# EAGLE board DaviShematic (EAGLE 9.6.2)
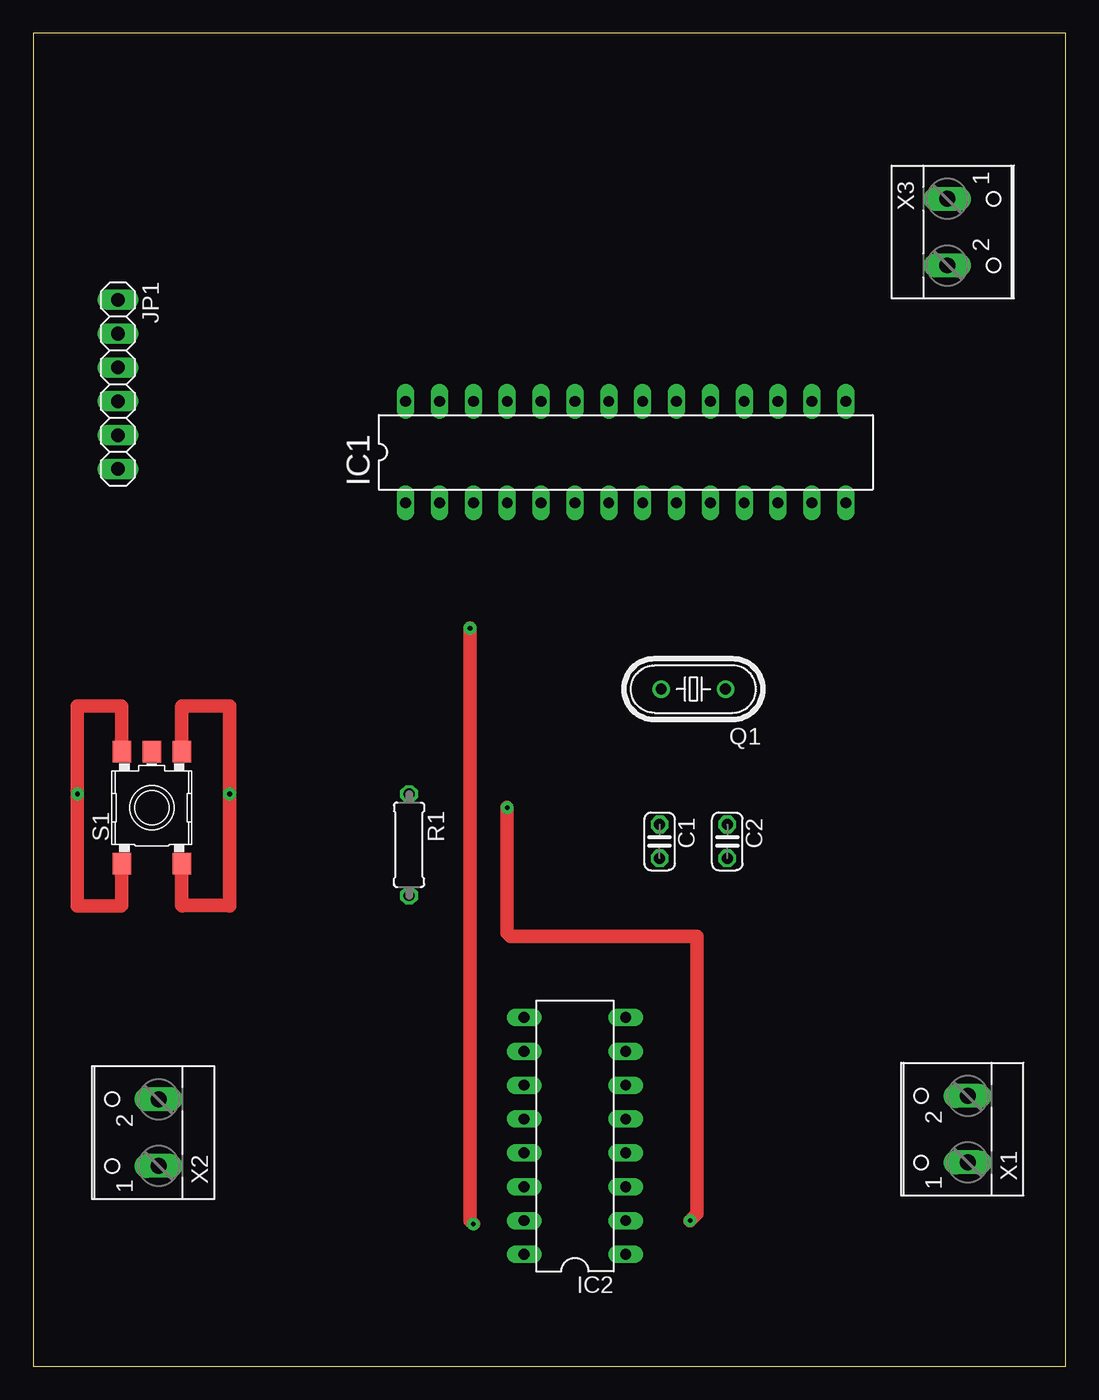
[diagram p0: board, top side]
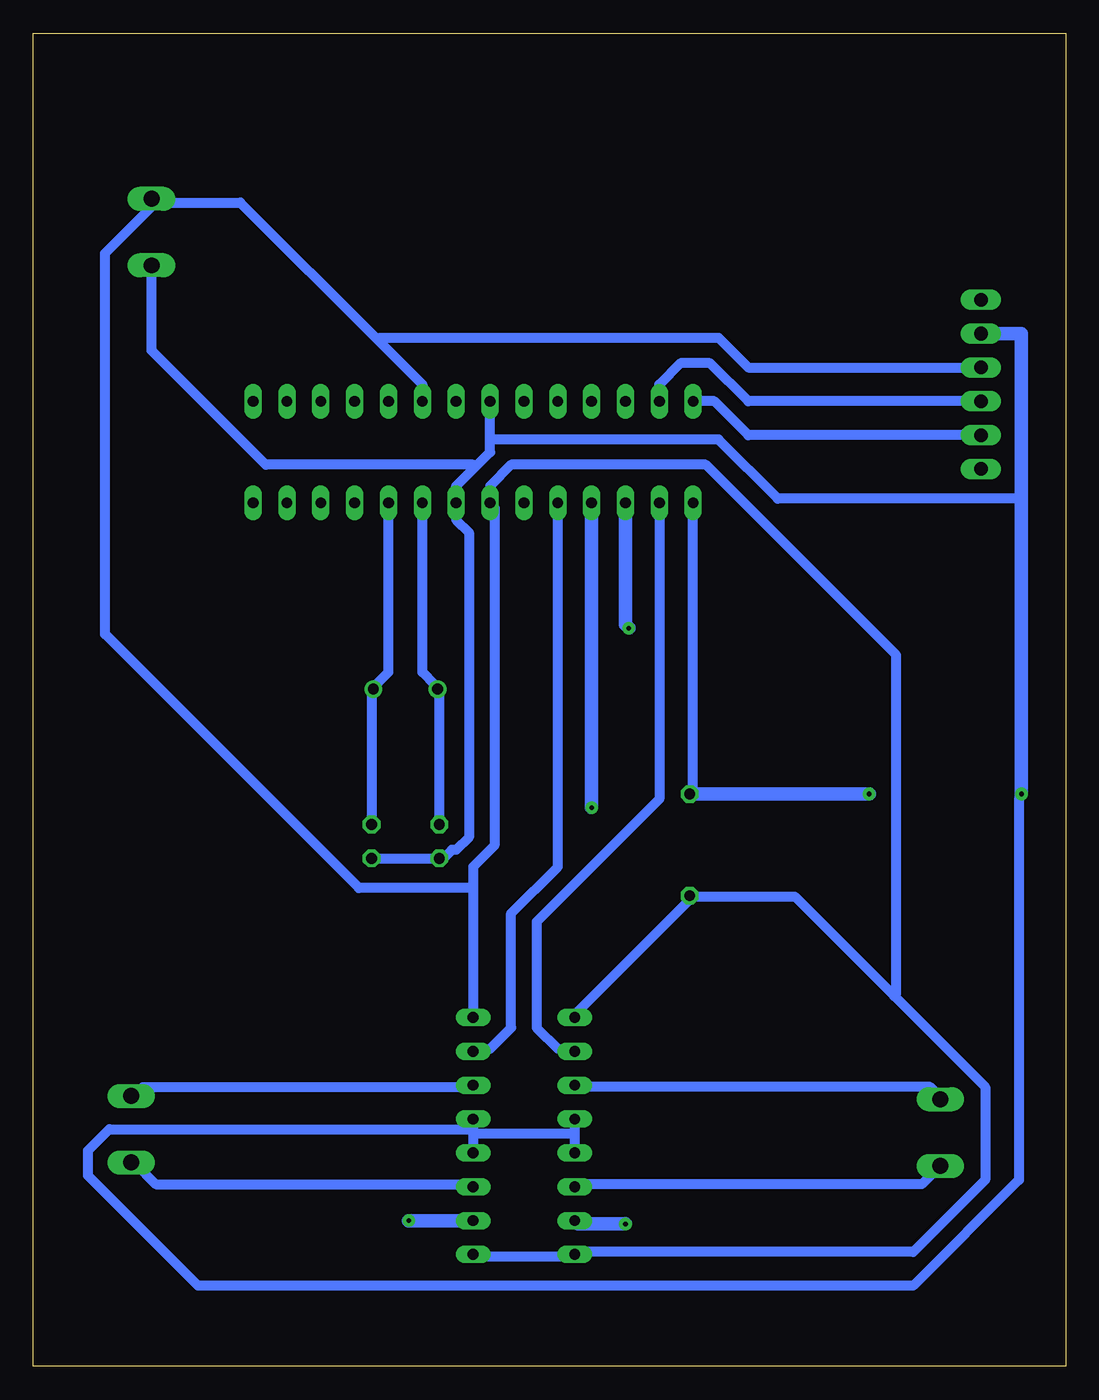
[diagram p1: board, bottom side, seen from below]

Size 77.45 x 100 mm. Coordinates in mm from the lower left corner, seen from the top.
Outline: 0,0 77.45,0 77.45,100 0,100 0,0
Copper layers (1*16): Top 0.035mm / dielectric 1.5mm / Bottom 0.035mm
Design rules "default *": minimum track width 30mil, minimum drill 0.35mm, track to track 40mil, track to pad 40mil, pad to pad 40mil, via to via 40mil, smd to smd 6mil, copper to edge 40mil, drill to drill 6mil, minimum pad ring 10mil, minimum via ring 8mil, stop-mask expansion 4mil, vias tented up to drill 0mil, thermal gap 10mil

## Footprints (pad centres in the part's own frame; a part is rotated, then mirrored left to right if it is on the bottom)
C025-024X044 = drill 0.813 octagon: 1 -1.27,0; 2 1.27,0
DIL28-3 = drill 0.813 long: 1 -16.51,-3.81; 2 -13.97,-3.81; 3 -11.43,-3.81; 4 -8.89,-3.81; 5 -6.35,-3.81; 6 -3.81,-3.81; 7 -1.27,-3.81; 8 1.27,-3.81; 9 3.81,-3.81; 10 6.35,-3.81; 11 8.89,-3.81; 12 11.43,-3.81; 13 13.97,-3.81; 14 16.51,-3.81; 15 16.51,3.81; 16 13.97,3.81; 17 11.43,3.81; 18 8.89,3.81; 19 6.35,3.81; 20 3.81,3.81; 21 1.27,3.81; 22 -1.27,3.81; 23 -3.81,3.81; 24 -6.35,3.81; 25 -8.89,3.81; 26 -11.43,3.81; 27 -13.97,3.81; 28 -16.51,3.81
DIL16 = drill 0.813 long: 1 -8.89,-3.81; 2 -6.35,-3.81; 3 -3.81,-3.81; 4 -1.27,-3.81; 5 1.27,-3.81; 6 3.81,-3.81; 7 6.35,-3.81; 8 8.89,-3.81; 9 8.89,3.81; 10 6.35,3.81; 11 3.81,3.81; 12 1.27,3.81; 13 -1.27,3.81; 14 -3.81,3.81; 15 -6.35,3.81; 16 -8.89,3.81
1X06 = drill 1.016 long: 1 -6.35,0; 2 -3.81,0; 3 -1.27,0; 4 1.27,0; 5 3.81,0; 6 6.35,0
HC49U-V = drill 0.813: 1 -2.413,0; 2 2.413,0
0207/7 = drill 0.813 octagon: 1 -3.81,0; 2 3.81,0
SKHMPXE010 = smd 1.6 x 1.4: 1 -4.2,2.25; 2 4.2,2.25; 3 -4.2,-2.25; 4 4.2,-2.25; 5 4.2,0
W237-102 = drill 1.194 long: 1 -2.5,-1.27; 2 2.5,-1.27

## Placement (x,y rotation side)
C1  [C025-024X044]  46.99,39.37 270 top
C2  [C025-024X044]  52.07,39.37 270 top
IC1  MEGA8-P  [DIL28-3]  44.45,68.58 0 top
IC2  L293D  [DIL16]  40.64,17.27 90 top
JP1  [1X06]  6.35,73.66 270 top
Q1  [HC49U-V]  49.53,50.8 180 top
R1  10k  [0207/7]  28.19,39.12 270 top
S1  SKHMPSE010  [SKHMPXE010]  8.89,41.91 90 top
X1  [W237-102]  68.83,17.78 90 top
X2  [W237-102]  8.13,17.53 90 top
X3  [W237-102]  69.85,85.09 270 top

## Library data of the parts
C1 C2 = rcl; SPICEPREFIX: C
IC1 = atmel; OC_FARNELL: unknown; OC_NEWARK: unknown
IC2 = st-microelectronics; MPN: L293D; OC_FARNELL: 9589619; OC_NEWARK: 56P8249
JP1 = pinhead
Q1 = crystal; OC_FARNELL: 1666969; OC_NEWARK: unknown
R1 = rcl; SPICEPREFIX: R
S1 = switch
X1-X3 = con-wago-500; MPN: 237-102; OC_FARNELL: unknown; OC_NEWARK: 70K9898

## Nets
+5V: IC1.7 IC1.20 IC2.1 IC2.8 IC2.9 IC2.16 JP1.3 R1.2 X3.1
GND: C1.2 C2.2 IC1.8 IC1.22 IC2.4 IC2.5 IC2.12 IC2.13 JP1.2 S1.1 S1.2 X3.2
INT: JP1.6
N$1: IC1.1 R1.1 S1.3 S1.4
N$2: C1.1 IC1.9 Q1.2
N$3: C2.1 IC1.10 Q1.1
N$4: IC2.3 X1.1
N$5: IC2.6 X1.2
N$6: IC2.14 X2.1
N$7: IC2.11 X2.2
N$8: IC1.4 IC2.2
N$9: IC1.5 IC2.7
N$10: IC1.3 IC2.15
N$11: IC1.2 IC2.10
SCL: IC1.28 JP1.5
SDA: IC1.27 JP1.4
VL: JP1.1

## Tracks (layer width: path | path; a pad name or v marks a point on that pad's centre or on a via)
+5V
  Bottom 0.762: IC1.20 48.26,73.66 51.59,76.99 | 51.59,76.99 61.91,87.31 68.58,87.31 X3.1 68.58,87 72.07,83.5 72.07,54.93 53.02,35.88 44.45,35.88 | JP1.3 23.81,74.93 26.03,77.15 51.44,77.15 51.59,76.99 | 44.45,35.88 44.45,37.47 42.86,39.05 42.86,64.45 IC1.7 43.18,66.04 41.59,67.63 26.99,67.63 12.7,53.34 12.7,27.94 12.86,27.78 | 44.45,35.88 IC2.8 | IC2.1 44.45,8.26 36.83,8.26 IC2.16 36.51,8.57 11.43,8.57 6.03,13.97 6.03,20.95 12.86,27.78 | IC2.9 36.83,26.35 27.94,35.24 R1.2 27.62,35.24 20.32,35.24 12.86,27.78
GND  (via drill 0.35 pad 0.95)
  Top 1.016: S1.2 6.64,49.49 6.6,49.53 3.3,49.53 v3.3,42.93 3.3,34.54 6.6,34.54 6.64,34.58 S1.1
  Bottom 0.762: C2.2 C1.2 46.67,38.1 46.04,38.73 45.72,38.73 44.77,39.69 44.77,62.55 45.72,63.5 IC1.8 45.72,66.04 44.29,67.47 | 43.18,69.53 43.18,68.58 44.29,67.47 | 43.18,69.53 IC1.22 | X3.2 68.58,76.2 60.01,67.63 44.45,67.63 44.29,67.47 | IC2.12 36.83,17.46 | 36.83,17.46 IC2.13 | IC2.5 44.45,17.78 | 44.45,17.78 44.45,17.46 | 44.45,17.46 IC2.4 | 44.45,17.46 36.83,17.46 | 44.45,17.78 71.76,17.78 73.34,16.19 73.34,14.29 65.09,6.03 11.43,6.03 3.49,13.97 3.49,42.55 v3.3,42.93 | 43.18,69.53 26.03,69.53 21.59,65.09 3.3,65.09
  Bottom 1.016: v3.3,42.93 3.3,65.09 3.3,77.47 JP1.2
N$1  (via drill 0.35 pad 0.95)
  Top 1.016: S1.4 11.14,49.49 11.18,49.53 14.73,49.53 v14.73,42.93 14.73,34.62 14.7,34.58 | S1.3 11.14,34.58 | 11.18,34.54 11.14,34.58 | 11.14,34.58 14.7,34.58 | 14.7,34.58 14.73,34.54
  Bottom 0.762: IC1.1 27.94,43.18 R1.1
  Bottom 1.016: v14.73,42.93 R1.1
N$2
  Bottom 0.762: C1.1 46.99,50.8 Q1.2 47.31,51.12 48.26,52.07 IC1.9
N$3
  Bottom 0.762: C2.1 52.07,50.8 Q1.1 51.75,51.12 50.8,52.07 IC1.10
N$4
  Bottom 0.762: IC2.3 44.45,13.65 68.26,13.65 69.85,15.24 X1.1
N$5
  Bottom 0.762: IC2.6 44.45,20.95 69.21,20.95 69.85,20.32 X1.2
N$6
  Bottom 0.762: IC2.14 36.83,13.65 10.8,13.65 9.53,14.92 X2.1
N$7
  Bottom 0.762: IC2.11 36.83,20.95 10.16,20.95 9.53,20.32 X2.2
N$8  (via drill 0.35 pad 0.95)
  Top 1.016: v35.56,41.91 35.56,32.51 35.81,32.26 49.78,32.26 49.78,11.43 v49.28,10.92
  Bottom 1.016: IC1.4 v35.56,41.91 | IC2.2 v49.28,10.92
N$9
  Bottom 0.762: IC1.5 38.1,37.47 41.59,33.97 41.59,25.4 43.18,23.81 44.45,23.81 IC2.7
N$10  (via drill 0.35 pad 0.95)
  Top 1.016: v32.77,55.37 32.77,10.92 v33.02,10.67
  Bottom 1.016: IC1.3 33.02,55.63 v32.77,55.37 | IC2.15 36.58,10.67 v33.02,10.67
N$11
  Bottom 0.762: IC1.2 30.48,42.55 39.69,33.34 39.69,25.4 38.1,23.81 36.83,23.81 IC2.10
SCL
  Bottom 0.762: IC1.28 26.35,72.39 23.81,69.85 JP1.5
SDA
  Bottom 0.762: IC1.27 30.48,73.66 28.89,75.25 26.67,75.25 23.81,72.39 JP1.4